# Altium PCB USB转接板.PcbDoc
Units mil, origin at the board's own origin, x right, y up, seen from the top; angles counter-clockwise.
Board outline 6000 x 4000 mil, 2 copper layers (Top Layer, Bottom Layer); 15 components, 29 nets, 87 pads, 0 vias.
Unrouted connection lines stored in the file: 33.
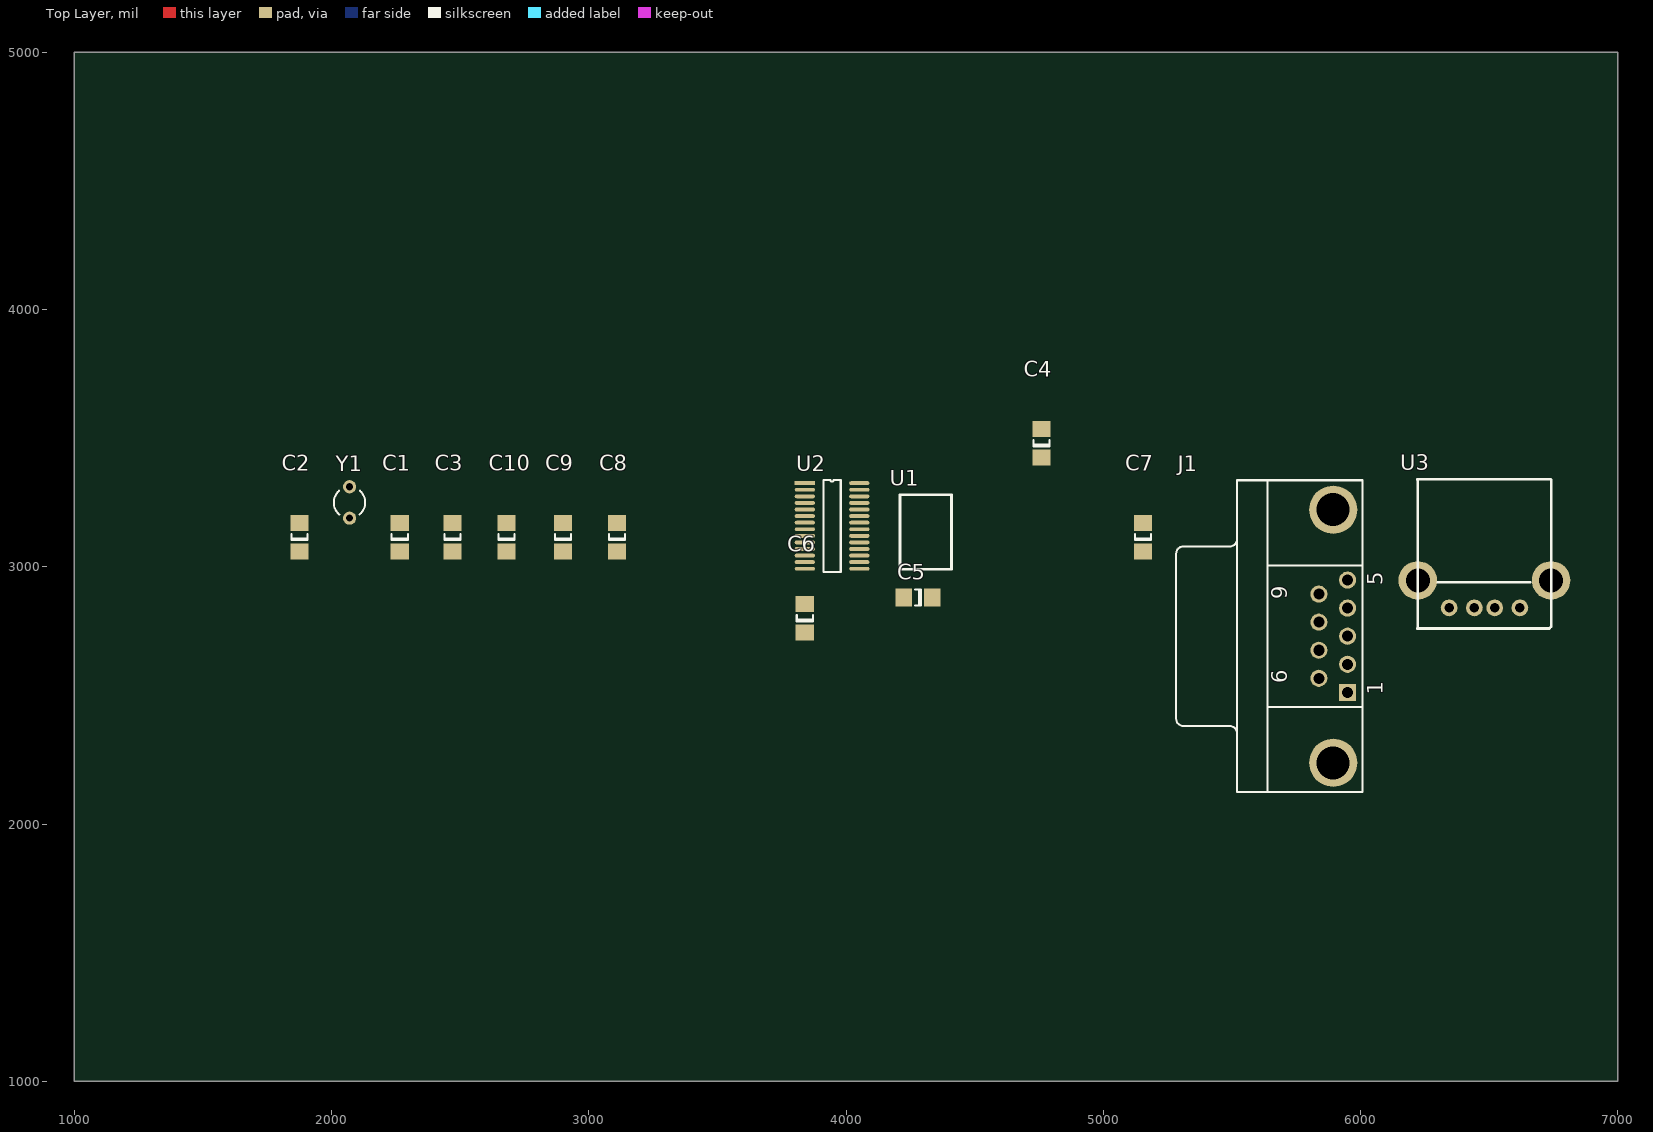
[diagram p0: Top Layer view]
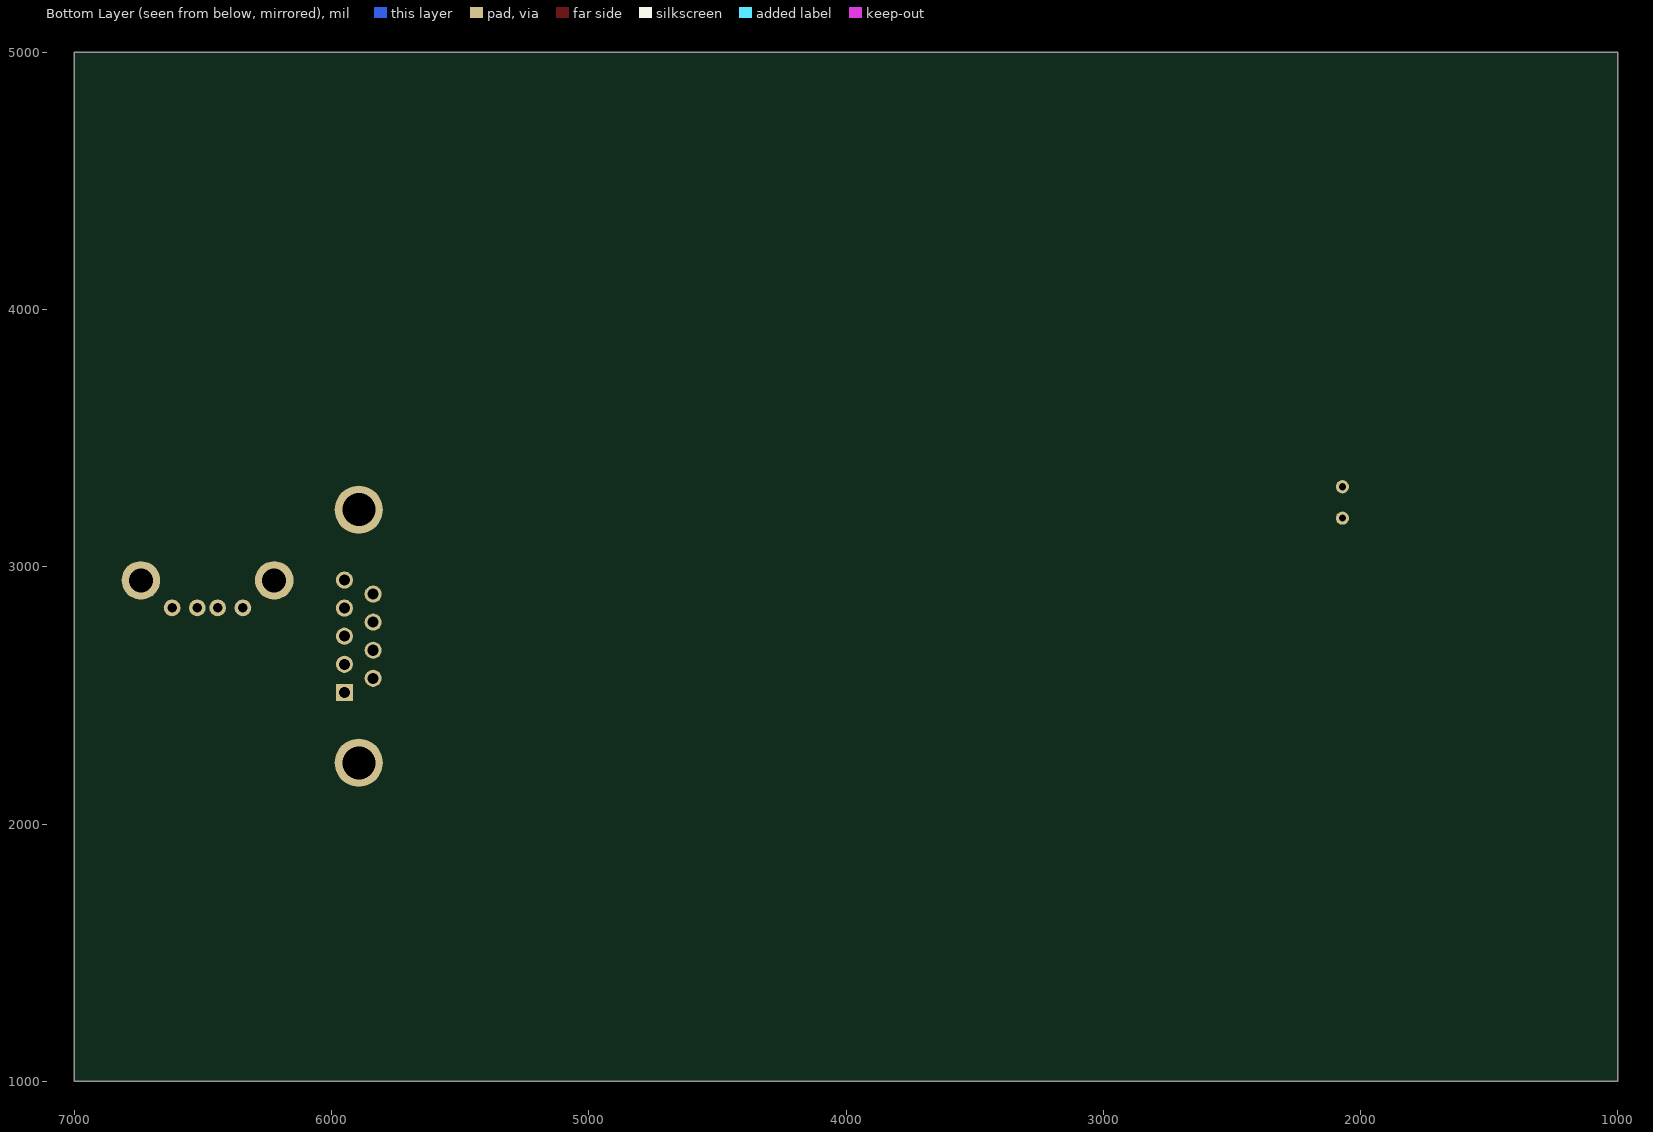
[diagram p1: Bottom Layer view, seen from below]

## Layer stack, top to bottom
Top Layer: signal copper 1.4
Dielectric: dielectric 12.6, FR-4, Dk 4.8
Bottom Layer: signal copper 1.4

## Board outline
1000,1000 7000,1000 7000,5000 1000,5000

## Design rules (kind name [scope] priority, off if disabled: settings)
Clearance [All] p1: gap=10
MinimumSolderMaskSliver [All] p1 off: minsoldermaskwidth=10
PolygonConnect [All] p1: connectstyle=Relief reliefconductorwidth=10 reliefentries=4 polygonreliefangle="90 Angle"
RoutingVias [All] p1: holewidth=28 width=50 viastyle="Through Hole" minholewidth=28 minwidth=50 maxholewidth=28 maxwidth=50
SilkToSilkClearance [All] p1 off: silktosilkclearance=10
SilkscreenOverComponentPads [All] p1 off: minsilkscreentomaskgap=10
SolderMaskExpansion [All] p1: expansion=4
TestPointUsage [All] p1: valid=0 allowmultiple=FALSE
Testpoint [All] p1: side=15 testpointundercomponent=TRUE minsize=40 maxsize=100 preferedsize=60 minholesize=0 maxholesize=40 preferedholesize=32 testpointgrid=1 style=1023 order=0-112345678
Width [All] p1: maxlimit=10 minlimit=10 preferedwidth=10
21 further rules are at their usual default settings.

## Components (designator, comment, footprint, x,y, rotation, side; value= is the part's Value field where it differs from the comment)
C1 "" C1206 2265,3115 r90 top
C2 "" C1206 1875,3115 r90 top
C3 "" C1206 2470,3115 r90 top
C4 "" C1206 4760,3480 r90 top
C5 "Cap Pol1" C1206 4280,2880 r180 top
C6 "" C1206 3840,2800 r90 top
C7 "" C1206 5155,3115 r90 top
C8 "" C1206 3110,3115 r90 top
C9 "" C1206 2900,3115 r90 top
C10 "" C1206 2680,3115 r90 top
J1 "D Connector 9" DSUB1.385-2H9 5520,2730 r90 top
U1 "CH340R" SSOP-20 4300,3140 r180 top
U2 "MAX213" SSOP-28 3840,3325 r0 top
U3 "USB" USB-A 6620,2840 r0 top
Y1 "XTAL" R38 2070,3250 r0 top

## Footprints (in the part's own frame and the unit in brackets; to place one, negate y for a bottom-side part, rotate by r counter-clockwise, add the part's x,y. Pads: shape width x height; smd on the part's side, far side on the other; paste and mask are expansions set on the pad)
C1206 [mm] "Chip Capacitor; Body 3.2 x 1.6 mm (LxW typ)"
  rect 1.6x1.8 smd: 1(-1.4,0) 2(1.4,0)
  silkscreen extent -0.3,-0.8 0.3,0.8
DSUB1.385-2H9 [mm] "Connector; D Subminiature; 9 Position; Right Angle; Pitch 1.385 mm"
  rect 1.69x1.69 hole 1.09: 1(-5.54,-10.92)
  round 1.69 hole 1.09: 2(-2.77,-10.92) 3(0,-10.92) 4(2.77,-10.92) 5(5.54,-10.92) 6(-4.155,-8.08) 7(-1.385,-8.08) 8(1.385,-8.08) 9(4.155,-8.08)
  round 4.76 hole 3.26: 10(-12.495,-9.5) 11(12.495,-9.5)
  silkscreen extent -15.4,-12.4 15.4,6
R38 [mm] "Crystal, Thru-Hole; 2 Leads; Body 3.1 x 8.2 mm (Dia.xH)"
  round 1.3 hole 0.7: 1(0,1.55) 2(0,-1.55)
  silkscreen extent -1.55,-1.19 1.55,1.17
SSOP-20 [mm]
  rect 1.2x0.3 on Bottom Paste: 1(-3.556,3.048) 2(-3.556,2.398) 3(-3.556,1.748) 4(-3.556,1.098) 5(-3.556,0.448) 6(-3.556,-0.202) 7(-3.556,-0.852) 8(-3.556,-1.502) 9(-3.556,-2.152) 10(-3.556,-2.802) 11(2.944,-2.802) 12(2.944,-2.152) 13(2.944,-1.502) 14(2.944,-0.852) 15(2.944,-0.202) 16(2.944,0.448) 17(2.944,1.098) 18(2.944,1.748) 19(2.944,2.398) 20(2.944,3.048)
  silkscreen extent -2.79,-3.56 2.29,3.81
SSOP-28 [mm]
  rect 2x0.38 smd: 1(0,0)
  oval 2x0.38 smd: 2(0,-0.65) 3(0,-1.3) 4(0,-1.95) 5(0,-2.6) 6(0,-3.25) 7(0,-3.9) 8(0,-4.55) 9(0,-5.2) 10(0,-5.85) 11(0,-6.5) 12(0,-7.15) 13(0,-7.8) 14(0,-8.45) 15(5.38,-8.45) 16(5.38,-7.8) 17(5.38,-7.15) 18(5.38,-6.5) 19(5.38,-5.85) 20(5.38,-5.2) 21(5.38,-4.55) 22(5.38,-3.9) 23(5.38,-3.25) 24(5.38,-2.6) 25(5.38,-1.95) 26(5.38,-1.3) 27(5.38,-0.65) 28(5.38,0)
  silkscreen extent 1.84,-8.78 3.54,0.33
USB-A [mil] "扁头USB封装"
  round 65 hole 37: 1(0,0) 2(-98.5,0) 3(-177,0) 4(-275.6,0)
  round 150 hole 93: 5(-397,107) 6(121,107)
  silkscreen extent -400,-80 121,500

## Part data
C1 C2 C3 C4 C6 C7 C8 C9 C10: library part Cap, "Capacitor"
C5: "Polarized Capacitor (Radial)"
J1: "Receptacle Assembly, 9 Position, Right Angle"
Y1: "Crystal Oscillator"

## Nets (pads, with @x,y where several pads share a name; then routed paths per layer and width w, separated by ;. In a path a pad name is that pad's centre, name@x,y a point inside that pad or via, vN(x,y) a via of type N, cw(c..) or ccw(c..) an arc to the next point about the centre after c; other vN are vias at no path point)
CTS: J1.8 U2.4
DCD: J1.1 U2.18
DSR: J1.6 U2.27
DTR: J1.4 U2.3
GND: C1.2 C2.2 C3.1 C7.2 C10.1 J1.5 U2.10 U3.4
NetC1_1: C1.1 Y1.2
NetC2_1: C2.1 Y1.1
NetC3_2: C3.2
NetC4_2: C4.2 C5.2 C7.1 U2.17
NetC6_1: C6.1 U2.16
NetC6_2: C6.2 U2.15
NetC8_1: C8.1 U2.12
NetC8_2: C8.2 U2.14
NetC9_1: C9.1 U2.13
NetU1_3: U2.7
NetU1_4: U2.8
NetU1_11: U2.5
NetU1_12: U2.26
NetU1_13: U2.22
NetU1_14: U2.19
NetU1_15: U2.6
NetU1_16: U2.20
RI: J1.9 U2.23
RTS: J1.7 U2.1
RX: J1.2 U2.9
TX: J1.3 U2.2
UD+: U3.2
UD-: U3.3
VCC: C4.1 C5.1 C9.2 C10.2 U2.11 U2.21 U2.24 U2.25 U3.1
pads on no net: J1.10 J1.11 U1.1 U1.2 U1.3 U1.4 U1.5 U1.6 U1.7 U1.8 U1.9 U1.10 U1.11 U1.12 U1.13 U1.14 U1.15 U1.16 U1.17 U1.18 U1.19 U1.20 U2.28 U3.5 U3.6

## Text inside footprints (layer, text, board x,y; h text height)
J1: Top Overlay "1" at 6085.94,2502.05 h59.06 r90; Top Overlay "5" at 6085.94,2928.43 h59.06 r90; Top Overlay "9" at 5715.87,2873.9 h59.06 r90; Top Overlay "6" at 5715.87,2546.73 h59.06 r90